# Altium PCB PCB1.PcbDoc
Units mil, origin at the board's own origin, x right, y up, seen from the top; angles counter-clockwise.
Board outline 2280 x 2260 mil, 2 copper layers (Top Layer, Bottom Layer); 65 components, 55 nets, 272 pads, 106 vias.
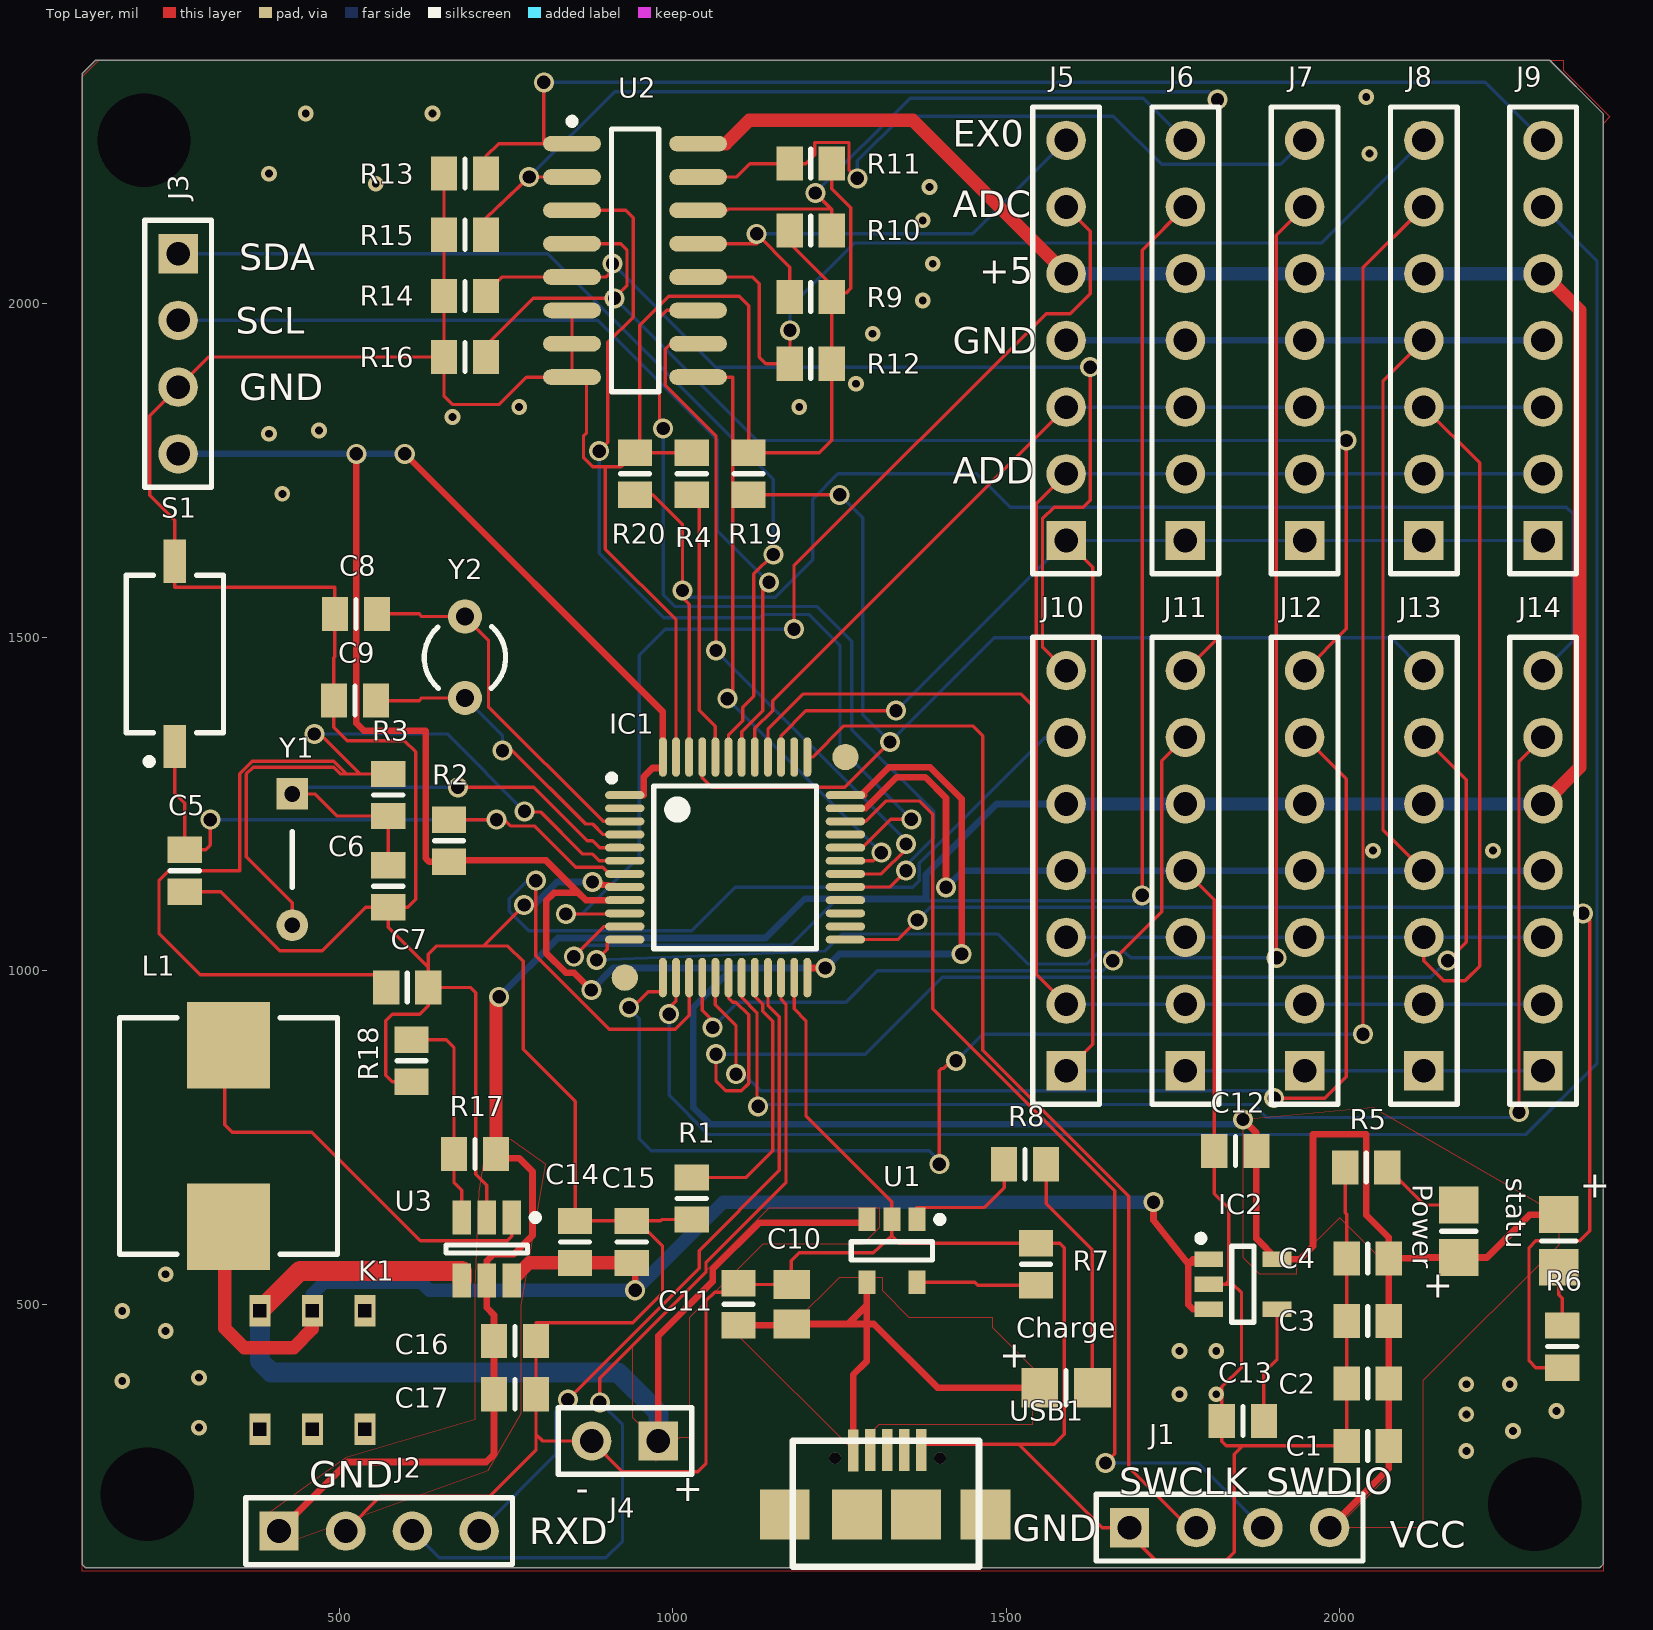
[diagram p0: Top Layer view]
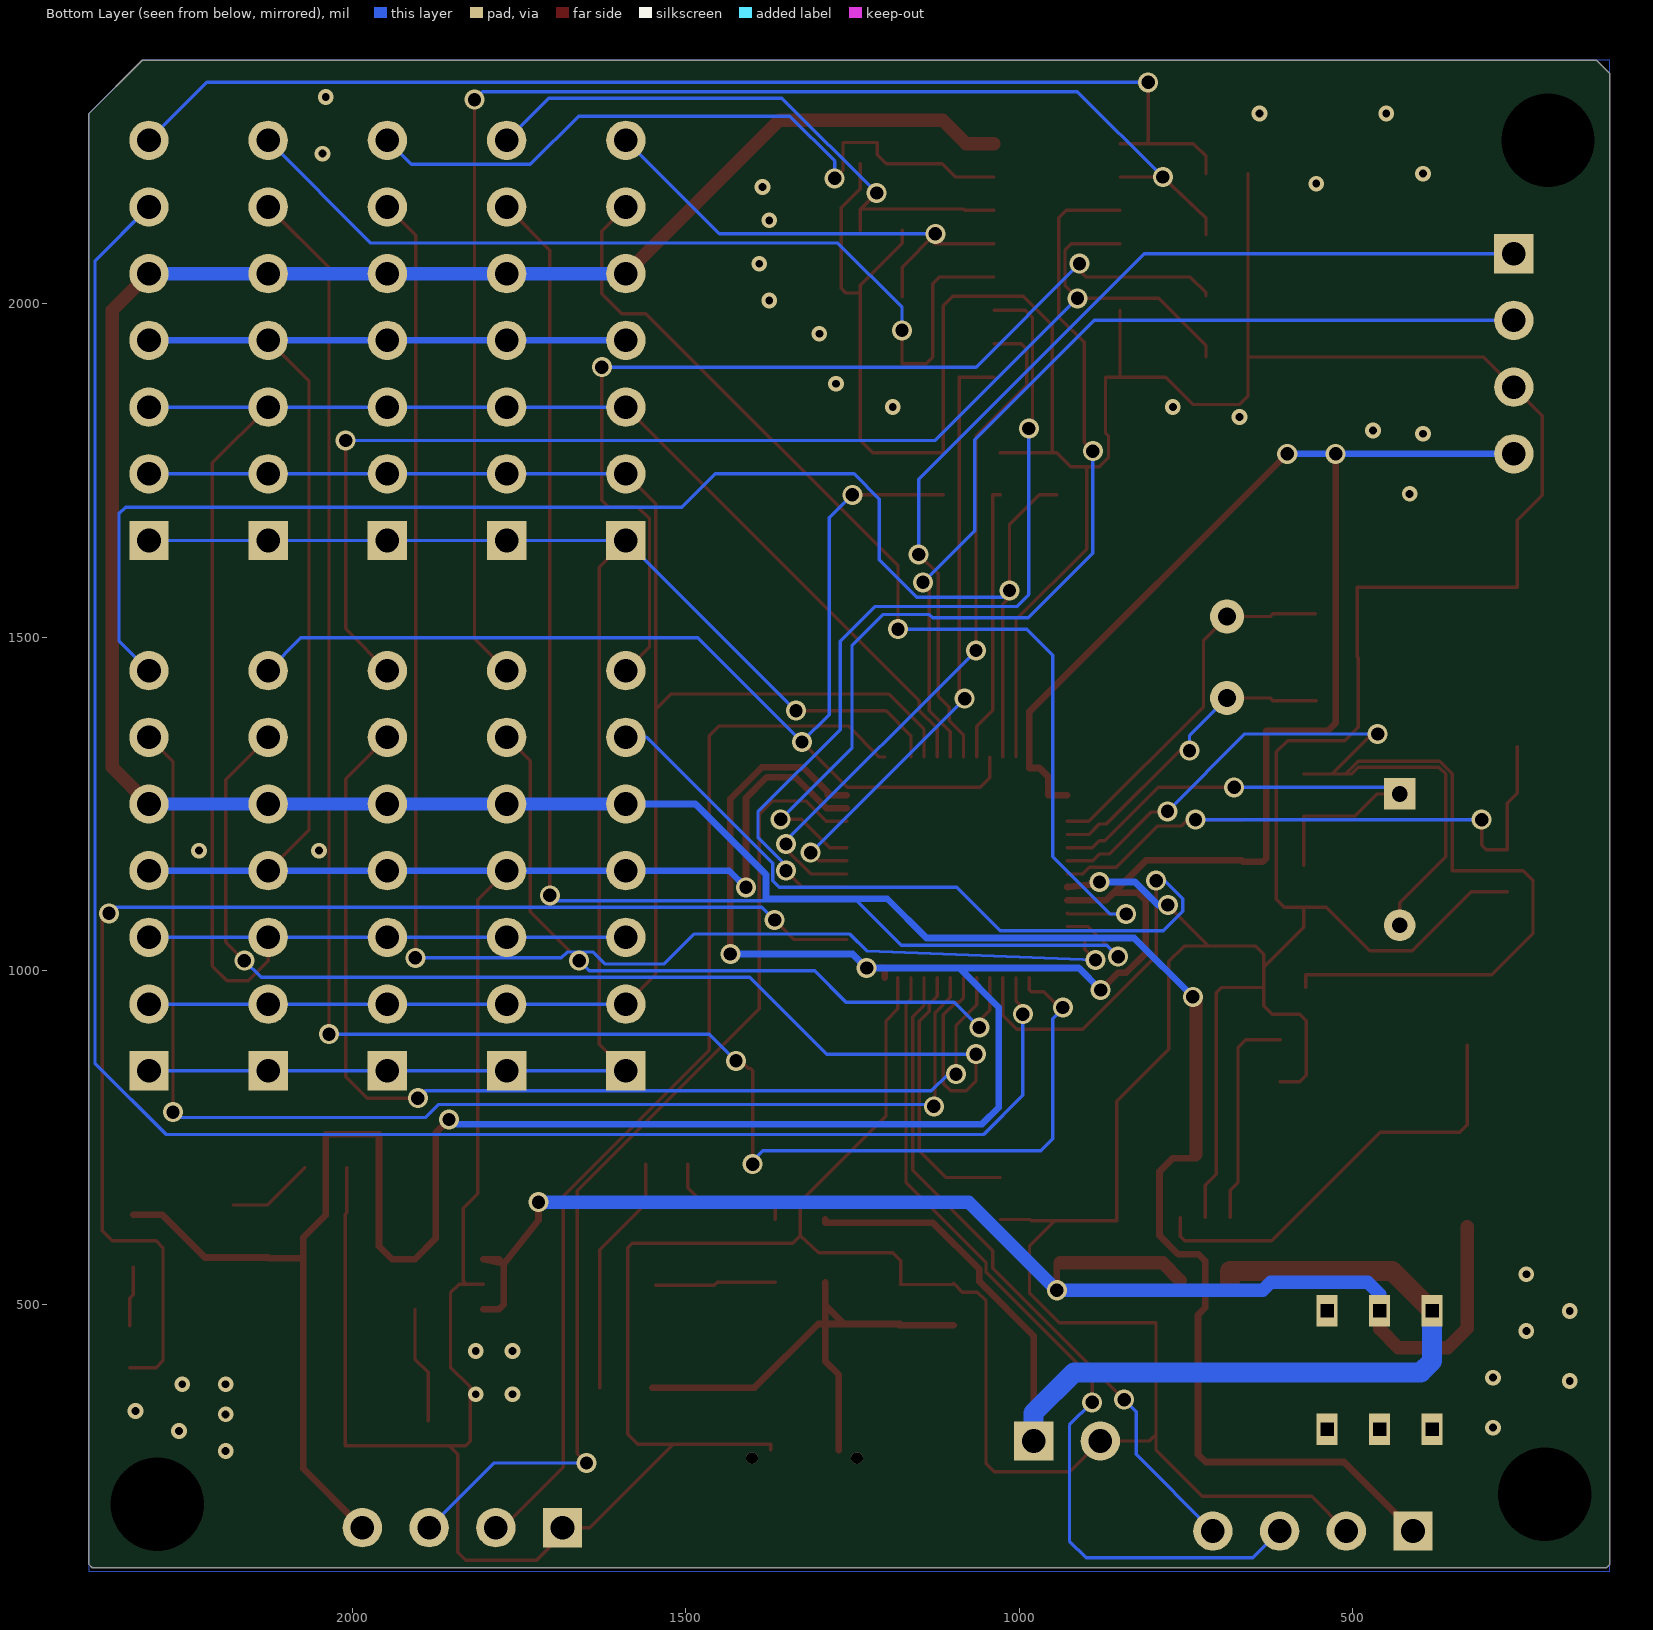
[diagram p1: Bottom Layer view, seen from below]

## Layer stack, top to bottom
Top Solder: solder mask 0.4, Solder Resist, Dk 3.5
Top Layer: signal copper 1.4
Dielectric 1: dielectric 12.6, FR-4, Dk 4.8
Bottom Layer: signal copper 1.4
Bottom Solder: solder mask 0.4, Solder Resist, Dk 3.5

## Board outline
115,110 120,105 2390,105 2395,110 2395,2285 2315,2365 135,2365 115,2345

## Design rules (kind name [scope] priority, off if disabled: settings)
Clearance Clearance_3 [InNamedPolygon('Top Layer-BAT') Or  InNamedPolygon('Top Layer-No Net') Or  InNamedPolygon('Top Layer-POWER') Or  InNamedPolygon('Top Layer-GND') Or  InNamedPolygon('Top Layer-+5') Or  InNamedPolygon('Top Layer-VCC3.3')] p1: gap=5 ignorepadtopadclearanceinfootprint=FALSE except(10: SMDPad-THPad THPad-THPad Fill-Fill Fill-Poly Fill-Region Poly-Poly Poly-Region Region-Region)
Clearance Clearance_1 [All] p2: gap=5 ignorepadtopadclearanceinfootprint=TRUE
PlaneConnect [All] p1: planeconnectstyle=Direct reliefexpansion=20 reliefentries=4 reliefconductorwidth=10 reliefairgap=10
PolygonConnect [All] p1: connectstyle=Direct reliefconductorwidth=10 reliefentries=4 polygonreliefangle="90 Angle" airgapwidth=10
RoutingVias [All] p1: holewidth=20 width=30 viastyle="Through Hole" minholewidth=15 minwidth=30 maxholewidth=20 maxwidth=50
SolderMaskExpansion [All] p1: expansion=4
Width [InNetClass('Power')] p1: maxlimit=30 minlimit=10 preferedwidth=10 minimp=50.000000 maximp=50.000000 favimp=50.000000
Width Width_2 [InNetClass('All Nets')] p2: maxlimit=25 minlimit=5 preferedwidth=5 minimp=50.000000 maximp=50.000000 favimp=50.000000
29 further rules are at their usual default settings.

## Classes and differential pairs
net class POWER: +5 BAT BAT+ GND POWER

## Components (designator, comment, footprint, x,y, rotation, side; value= is the part's Value field where it differs from the comment)
C1 "0.1uf" 6-0805_L 2042.25,287.5 r0 top value=104
C2 "1uf" 6-0805_L 2042.25,381.25 r0 top
C3 "0.1uf" 6-0805_L 2042.25,475 r0 top value=104
C4 "0.1uf" 6-0805_L 2042.25,568.75 r0 top value=104
C5 "0.1uf" 6-0805_L 268.75,1150 r90 top value=104
C6 "22pF" 6-0805_L 573.75,1126.5 r90 top
C7 "22pF" 6-0805_L 602.25,975 r180 top
C8 "22pF" 6-0805_L 525.25,1535 r0 top
C9 "22pF" 6-0805_L 523.75,1405 r0 top
C10 "1uF" C0805 1178.75,500 r90 top
C11 "0.1uf" 6-0805_L 1098.75,500 r270 top value=104
C12 "2.2uF" 6-0805_L 1843.75,730 r0 top
C13 "470pF" 6-0805_L 1855,325 r0 top
C14 "10uF" 6-0805_L 853.75,593.5 r270 top
C15 "0.1uF" 6-0805_L 938.75,593.5 r270 top
C16 "0.1uf" 6-0805_L 763.75,445 r180 top
C17 "22uf" 6-0805_L 763.75,365 r180 top
Charge "LED_Green" 6-0805_M 1590,375 r0 top (schematic designator D3)
IC1 "STM32F103C8T6" LQFP48 1093.75,1155 r0 top
IC2 "MIC5205-3.3" SOT-23-5 1855,530 r0 top
J1 "CON4" HDR1X4 1685,165 r0 top
J2 "蓝牙" HDR1X4 410,160 r0 top
J3 "MPU6050" HDR1X4 258.75,2075 r270 top
J4 "BAT" HDR1X2 978.75,295 r180 top
J5 "CON7" HDR1X7 1590,1645 r90 top
J6 "CON7" HDR1X7 1768.75,1645 r90 top
J7 "CON7" HDR1X7 1947.5,1645 r90 top
J8 "CON7" HDR1X7 2126.25,1645 r90 top
J9 "CON7" HDR1X7 2305,1645 r90 top
J10 "CON7" HDR1X7 1590,850 r90 top
J11 "CON7" HDR1X7 1768.75,850 r90 top
J12 "CON7" HDR1X7 1947.5,850 r90 top
J13 "CON7" HDR1X7 2126.25,850 r90 top
J14 "CON7" HDR1X7 2305,850 r90 top
K1 "BUTTON" switch 538.75,490 r270 top
L1 "10UH" 0850 334.26,752.26 r90 top
Power "LED_Red" 6-0805_M 2178.75,609.37 r90 top (schematic designator D1)
R1 "10K" 6-0805_L 1028.75,658.5 r270 top
R2 "10K" 6-0805_L 665,1195 r270 top
R3 "10M" 6-0805_L 573.75,1263.5 r90 top
R4 "10K" 6-0805_L 1028.75,1745 r270 top
R5 "1K" 6-0805_L 2040,705 r0 top
R6 "1K" 6-0805_L 2333.75,436.5 r90 top
R7 "330" 6-0805_L 1545,560 r90 top
R8 "330" 6-0805_L 1528.5,710 r0 top
R9 "10K" 6-0805_L 1207.25,2010 r180 top
R10 "10K" 6-0805_L 1207.25,2110 r0 top
R11 "10K" 6-0805_L 1207.25,2210 r180 top
R12 "10K" 6-0805_L 1207.25,1910 r180 top
R13 "10K" 6-0805_L 688.75,2195 r0 top
R14 "10K" 6-0805_L 688.75,2011.67 r0 top
R15 "10K" 6-0805_L 688.75,2103.33 r0 top
R16 "10K" 6-0805_L 688.75,1920 r0 top
R17 "525K" 6-0805_L 703.75,725 r180 top
R18 "100k" 6-0805_L 608.75,865 r270 top
R19 "10K" 6-0805_L 1113.75,1745 r270 top
R20 "10K" 6-0805_L 943.75,1745 r270 top
S1 "KEY_2P" button 253.75,1475 r90 top
statu "LED_Blue" 6-0805_M 2328.75,595 r270 top (schematic designator D2)
U1 "PW4054" SOT-23-CT5_L 1328.75,580 r270 top
U2 "CD4051BCM" M16A_N 943.75,2065 r0 top
U3 "PS7516" SOT23-6_M 721.35,582.76 r270 top
USB1 "MICRO USB" "MICRO USB" 1318.74,233.23 r0 top
Y1 "XTAL_8M" xtal 430,1265 r270 top
Y2 "XTAL_32.768K" R38 688.75,1470 r0 top

## Footprints (in the part's own frame and the unit in brackets; to place one, negate y for a bottom-side part, rotate by r counter-clockwise, add the part's x,y. Pads: shape width x height; smd on the part's side, far side on the other; paste and mask are expansions set on the pad)
6-0805_L [mm] "Chip Resistor, Body 2.0x1.2mm, IPC High Density"
  rect 1x1.3 smd: 1(-0.8,0) 2(0.8,0)
  silkscreen extent 0,-0.55 0,0.55, body extent -1.07,-0.7 1.07,0.7, height 0.7
6-0805_M [mm] "Chip Resistor, Body 2.0x1.2mm, IPC Low Density"
  rect 1.4x1.5 smd: 1(-1,0) 2(1,0)
  silkscreen extent 0,-0.65 0,0.65, body extent -1.07,-0.7 1.07,0.7, height 0.7
0850 [mm] "电感"
  rect 3.3x3.15 smd: 1(-3.45,0) 2(3.45,0)
  silkscreen extent -4.5,-4.15 4.5,4.15, body extent -4.5,-4.15 4.5,4.15, height 5
button [mm] "SODFL, 2-Leads, Body 3.70x8.00mm, IPC Medium Density"
  rect 1.65x0.85 smd: 1(-3.525,0) 2(3.525,0)
  silkscreen extent -4.22,-1.85 3,1.85, body extent -3,-1.85 3,1.85, height 2.5
C0805 [mm] "Chip Capacitor, Body 2.0x1.3mm, IPC High Density"
  rect 1.1x1.4 smd: 1(-0.75,0) 2(0.75,0)
  body extent -1.1,-0.72 1.1,0.72, height 1.4
HDR1X2 [mm] "Connector; Header; 2 Position"
  rect 1.5x1.5 hole 0.9: 1(0,0)
  round 1.5 hole 0.9: 2(2.54,0)
  silkscreen extent -1.27,-1.27 3.81,1.27
HDR1X4 [mm] "Connector; Header; 4 Position"
  rect 1.5x1.5 hole 0.9: 1(0,0)
  round 1.5 hole 0.9: 2(2.54,0) 3(5.08,0) 4(7.62,0)
  silkscreen extent -1.27,-1.27 8.89,1.27, body extent -1.27,-1.27 8.89,1.27, height 8.38
HDR1X7 [mm] "Connector; Header; 7 Position"
  rect 1.5x1.5 hole 0.9: 1(0,0)
  round 1.5 hole 0.9: 2(2.54,0) 3(5.08,0) 4(7.62,0) 5(10.16,0) 6(12.7,0) 7(15.24,0)
  silkscreen extent -1.27,-1.27 16.51,1.27
LQFP48 [mm]
  oval 1.5x0.3 smd: 1(-4.2,2.75) 2(-4.2,2.25) 3(-4.2,1.75) 4(-4.2,1.25) 5(-4.2,0.75) 6(-4.2,0.25) 7(-4.2,-0.25) 8(-4.2,-0.75) 9(-4.2,-1.25) 10(-4.2,-1.75) 11(-4.2,-2.25) 12(-4.2,-2.75) 25(4.2,-2.75) 26(4.2,-2.25) 27(4.2,-1.75) 28(4.2,-1.25) 29(4.2,-0.75) 30(4.2,-0.25) 31(4.2,0.25) 32(4.2,0.75) 33(4.2,1.25) 34(4.2,1.75) 35(4.2,2.25) 36(4.2,2.75)
  oval 0.3x1.5 smd: 13(-2.75,-4.2) 14(-2.25,-4.2) 15(-1.75,-4.2) 16(-1.25,-4.2) 17(-0.75,-4.2) 18(-0.25,-4.2) 19(0.25,-4.2) 20(0.75,-4.2) 21(1.25,-4.2) 22(1.75,-4.2) 23(2.25,-4.2) 24(2.75,-4.2) 37(2.75,4.2) 38(2.25,4.2) 39(1.75,4.2) 40(1.25,4.2) 41(0.75,4.2) 42(0.25,4.2) 43(-0.25,4.2) 44(-0.75,4.2) 45(-1.25,4.2) 46(-1.75,4.2) 47(-2.25,4.2) 48(-2.75,4.2)
  round 1 smd: 49(-4.2,-4.2) 50(4.2,4.2)
  silkscreen extent -4.82,-3.1 3.1,3.52, body extent -4.49,-4.5 4.5,4.5, height 1.6
M16A_N [mm] "SOIC, 16-Leads, Body 9.9x3.9mm, Pitch 1.27mm, IPC Medium Density"
  oval 2.2x0.6 smd: 1(-2.4,4.445) 2(-2.4,3.175) 3(-2.4,1.905) 4(-2.4,0.635) 5(-2.4,-0.635) 6(-2.4,-1.905) 7(-2.4,-3.175) 8(-2.4,-4.445) 9(2.4,-4.445) 10(2.4,-3.175) 11(2.4,-1.905) 12(2.4,-0.635) 13(2.4,0.635) 14(2.4,1.905) 15(2.4,3.175) 16(2.4,4.445)
  silkscreen extent -2.52,-5 0.9,5.42, body extent -2,-5 2,5, height 1.75
"MICRO USB" [mm]
  rect 0.4x1.6 smd: 1(-1.216,1.214) 2(-0.575,1.225) 3(0.075,1.225) 4(0.725,1.225) 5(1.375,1.225)
  rect 1.9x1.9 smd: ""(-3.825,-1.225) ""(-1.075,-1.225) ""(1.175,-1.225) ""(3.825,-1.225)
  silkscreen extent -3.53,-3.22 3.57,1.58, body extent -4.43,-3.77 4.38,1.82, height 2.54
R38 [mm] "Crystal, Thru-Hole; 2 Leads; Body 3.1 x 8.2 mm (Dia.xH)"
  round 1.3 hole 0.7: 1(0,1.55) 2(0,-1.55)
  silkscreen extent -1.55,-1.19 1.55,1.17
SOT23-6_M [mm] "SOT23, 6-Leads, Body 2.9x1.6mm, Pitch 0.95mm, Lead Span 2.7mm, IPC Low Density"
  rect 1.3x0.7 smd: 1(-1.2,0.95) 2(-1.2,0) 3(-1.2,-0.95) 4(1.2,-0.95) 5(1.2,0) 6(1.2,0.95)
  silkscreen extent -1.32,-1.55 0.15,1.98, body extent -0.9,-1.55 0.9,1.55, height 1.45
SOT-23-5 [mm]
  rect 1.1x0.6 smd: 1(-1.3,0.95) 2(-1.3,0) 3(-1.3,-0.95) 4(1.3,-0.95) 5(1.3,0.95)
  silkscreen extent -1.72,-1.45 0.42,1.87, body extent -1.37,-1.45 1.43,1.45, height 1.45
SOT-23-CT5_L [mm] "SOT23, 5-Leads, Body 2.9x1.6mm, Pitch 0.95mm, Lead Span 2.7mm, IPC High Density"
  rect 0.9x0.65 smd: 1(-1.2,0.95) 2(-1.2,0) 3(-1.2,-0.95) 4(1.2,-0.95) 5(1.2,0.95)
  silkscreen extent -1.32,-1.55 0.35,1.95, body extent -0.9,-1.55 0.9,1.55, height 1.45
switch [mm]
  rect 1.2x0.8 hole 0.5 square: 1(0,0) 2(0,-2) 3(0,-4) 4(4.5,0) 5(4.5,-2) 6(4.5,-4)
xtal [mm]
  rect 1.2x1.2 hole 0.6: 1(0,0)
  round 1.2 hole 0.6: 2(5,0)
  silkscreen extent 1.43,0 3.56,0

## Part data
C1 C2 C3 C4 C5 C6 C7 C8 C9 C11 C12 C13 C14 C15 C16 C17: library part "Cap Semi", "Capacitor (Semiconductor SIM Model)", LatestRevisionDate=29-May-2009, LatestRevisionNote="IPC-7351 Footprint Added.", PackageDescription="Chip Capacitor", PackageReference=C1206, Published=8-Jun-2000, Publisher="Altium Limited"
C10: library part "Cap Pol3", "Polarized Capacitor (Surface Mount)", LatestRevisionDate=29-May-2009, LatestRevisionNote="IPC-7351 Footprint Added.", PackageDescription="Chip Capacitor", PackageReference=C0805, Published=8-Jun-2000, Publisher="Altium Limited"
Charge Power statu: library part LED, "LED"
IC1: "单片机", ComponentLink1Description="Manufacturer Link", ComponentLink1URL=www.st.com/stm32, ComponentLink2Description=Datasheet, ComponentLink2URL=http://www.st.com/stonline/products/literature/ds/13587.pdf, DatasheetVersion="rev6, Mar-2008", PackageDescription="48-Pin Low-Profile Quad Flat Pack, 7 x 7 mm Body, 0.5 mm Pitch (LQFP48)", PackageReference=LQFP48, PackageVersion=Mar-2008, Published=30-May-2008, Publisher="Altium Limited"
IC2: "稳压"
J1: "连接器"
J2 J3: library part CON4, "Connector"
J4: library part CON2, "Conjunctor"
J5 J6 J7 J8 J9 J10 J11 J12 J13 J14: "Connector"
K1: "自锁按键"
L1: library part Inductor, "电感"
R1 R2 R3 R4 R5 R6 R7 R8 R9 R10 R11 R12 R13 R14 R15 R16 R17 R18 R19 R20: library part Res3, "Resistor", LatestRevisionDate=29-May-2009, LatestRevisionNote="IPC-7351 Footprint Added.", PackageDescription="Chip Resistor", PackageReference=J1-0603, Published=8-Jun-2000, Publisher="Altium Limited"
S1: "轻触按键2P"
U2: "8-Channel Analog Multiplexer/Demultiplexer", Code_IPC=SOIC127P600-16, ComponentLink1Description="Manufacturer Link", ComponentLink1URL=http://www.fairchildsemi.com/, ComponentLink2Description=Datasheet, ComponentLink2URL=http://www.fairchildsemi.com/ds/CD%2FCD4052BC.pdf, DatasheetVersion=Jan-1999, LatestRevisionDate=13-Apr-2006, LatestRevisionNote="IPC-7351 Footprint Added.", PackageDescription="16-Pin Small Outline Integrated Circuit 1.27 mm Pitch", PackageReference=M16A, PackageVersion=2000, Published=17-Jul-2002, Publisher="Altium Limited"
Y1 Y2: library part XTAL, "Crystal Oscillator", LatestRevisionDate=17-Jul-2002, LatestRevisionNote="Re-released for DXP Platform.", PackageDescription="Crystal, Thru-Hole; 2 Leads; Body 3.1 x 8.2 mm (Dia.xH)", PackageReference=R38, Published=8-Jun-2000, Publisher="Altium Limited"

## Free pads (board coordinates)
  rect 47.24x31.5 hole 140: ""(207.5,2245) ""(212.5,215) ""(2292.5,200)

## Via types
v1: diameter 30, hole 20, Top Layer to Bottom Layer, tented both sides, 68 vias
v2: diameter 23.62, hole 11.81, Top Layer to Bottom Layer, tented both sides, 36 vias
v3: diameter 17.72, hole 17.72, Top Layer to Bottom Layer, 2 vias

## Nets (pads, with @x,y where several pads share a name; then routed paths per layer and width w, separated by ;. In a path a pad name is that pad's centre, name@x,y a point inside that pad or via, vN(x,y) a via of type N, cw(c..) or ccw(c..) an arc to the next point about the centre after c; other vN are vias at no path point)
+5: C16.2 C17.2 J2.1 J5.5 J6.5 J7.5 J8.5 J9.5 J10.5 J11.5 J12.5 J13.5 J14.5 R17.1 U2.16 U3.5 | length 5074.8
  Top Layer w10: J2.1 513.51,263.51 720.76,263.51 732.25,275 C17.2 C16.2 732.25,484 721.35,494.91 U3.5 721.35,565 731.35,575 762,575 790,603 790,699 770,719 735.25,719 R17.1 ; v1@735.25,956.25 v1(740,961)
  Top Layer w20: R17.1 v1@735.25,956.25 ; U2.16 1080,2240 1115,2275 1360,2275 J5.5 ; J14.5 2360,1305 2360,1990 J9.5
  Bottom Layer w10: v1(740,961) 828,1049 1139.22,1049 1198.22,1108 1380,1108 1380,1144.15 1485.85,1250 J10.5
  Bottom Layer w20: J10.5 J11.5 J12.5 J13.5 J14.5 ; J5.5 J6.5 J7.5 J8.5 J9.5
ADC0: IC1.10 J5.6 | length 1637.4
  Top Layer w5: v1(840,1085) 927.29,1085 IC1.10 ; v1(1182,1512) 1182,1607 1560,1985 1596,1985 1626,2015 1626,2109 J5.6
  Bottom Layer w5: v1(840,1085) 863.82,1085 950,1171.18 950,1473 989,1512 v1(1182,1512)
ADC1: IC1.11 J6.6 | length 2044.1
  Top Layer w5: v1(852,1021) 897.42,1066.42 IC1.11 ; v1(1704,1113) 1704,2080.25 J6.6
  Bottom Layer w5: v1(852,1021) 869,1038 1177,1038 1244,1105 1696,1105 v1(1704,1113)
ADC2: IC1.12 J7.6 | length 2267.8
  Top Layer w5: v1(886,1016) 902,1032 902,1046.73 IC1.12 ; v1(1905.75,1019.25) 1905,1020 1905,2102.5 J7.6
  Bottom Layer w5: v1(886,1016) 1228.5,1029.5 1254,1055 1488,1055 1533,1010 1620.79,1010 1638.83,1028.04 1677.79,1028.04 1686.58,1019.25 v1(1905.75,1019.25)
ADC3: IC1.13 J8.6 | length 2827.4
  Top Layer w5: v1(935,945) 935.43,944.57 939.57,944.57 963.52,968.52 982.34,968.52 985.48,971.67 IC1.13 ; v1(1400,710) 1400,850 1403.54,853.54 1406.77,853.54 1418.24,865 v1(1425,865) ; v1(2035,905) 2035,2053.75 J8.6
  Bottom Layer w5: v1(935,945) 935,943.18 950,928.18 950,747.93 967.93,730 1385,730 1400,715 v1(1400,710) ; v1(1425,865) 1465,905 v1(2035,905)
ADC4: IC1.14 J9.6 | length 2957.4
  Top Layer w5: v1(995,935) 995,945 1005.17,955.17 IC1.14
  Bottom Layer w5: v1(995,935) 995,813.32 1053.82,754.5 2279.16,754.5 2386,861.34 2386,2064 J9.6
ADC5: IC1.15 J10.6 | length 1505.3
  Top Layer w5: v1(795,1135) 795,1022.55 905.05,912.5 1004.32,912.5 1024.85,933.03 IC1.15
  Bottom Layer w5: v1(795,1135) 782.18,1135 755,1107.82 755,1089.18 784.18,1060 1029,1060 1094,1125 1360,1125 1370,1135 1370,1161 1559,1350 J10.6
ADC6: IC1.16 J11.6 | length 1102.5
  Top Layer w5: IC1.16 1044.54,940.46 1060,925 v1(1060,915) ; v1(1660,1015) 1733.22,1088.22 1733.22,1314.47 J11.6
  Bottom Layer w5: v1(1060,915) 1098,953 1260,953 1307,1000 1645,1000 v1(1660,1015)
ADC7: IC1.17 J12.6 | length 1635.4
  Top Layer w5: IC1.17 1064.22,948.78 1095,918 v1(1095,845) ; v1(1902,809) 1978,809 2010,841 2010,1287.5 J12.6
  Bottom Layer w5: v1(1095,845) 1107,845 1132,820 1891,820 v1(1902,809)
ADC8: IC1.18 J13.6 | length 1801.8
  Top Layer w5: v1(1065,875) 1065,835 1080,820 1103,820 1113.96,830.96 1113.96,934.1 1095.05,953 1090,953 1083.91,959.09 IC1.18 ; J13.6 2190,1286.25 2190,1043 v1(2162,1015)
  Bottom Layer w5: v1(1065,875) 1289,875 1404,990 2137,990 v1(2162,1015)
ADC9: IC1.19 J14.6 | length 1933.3
  Top Layer w5: IC1.19 1103.59,960 1126.5,937.09 1126.5,798.5 v1(1128.25,796.75) ; v1(2269,788) 2269,1314 J14.6
  Bottom Layer w5: v1(1128.25,796.75) 1131,799.5 1870.5,799.5 1890,780 2261,780 v1(2269,788)
Address_0: IC1.29 U2.11 | length 1305.3
  Top Layer w5: v1(986,1813) 980.43,1818.57 980.43,1979.43 991,1990 U2.11 ; IC1.29 1325.47,1125.47 v1(1350,1150)
  Bottom Layer w5: v1(986,1813) 986,1564 1004,1546 1217,1546 1268.79,1494.21 1268.79,1361.21 1392,1238 1392,1200 1350,1158 v1(1350,1150)
Address_1: IC1.30 U2.10 | length 1058.2
  Top Layer w5: U2.10 997,1940 988.93,1931.93 988.93,1878.07 1065,1802 v1(1065,1480) ; IC1.30 1312.96,1145.16 1350,1182.2 v1(1350,1190)
  Bottom Layer w5: v1(1065,1480) 1350,1195 v1(1350,1190)
Address_2: IC1.31 U2.9 | length 922.7
  Top Layer w5: U2.9 1090,1890 1090,1415.98 v1(1082,1407.98) ; IC1.31 1300.82,1164.84 v1(1312.98,1177)
  Bottom Layer w5: v1(1082,1407.98) v1(1312.98,1177)
Address_3: IC1.39 J5.1 J6.1 J7.1 J8.1 J9.1 J10.1 J11.1 J12.1 J13.1 J14.1 | length 2838.9
  Top Layer w5: IC1.39 1162.65,1352.65 1200,1390 v1(1335,1390) ; J10.1 1630,890 1630,1605 J5.1
  Bottom Layer w5: v1(1335,1390) J5.1 J6.1 J7.1 J8.1 J9.1 ; J10.1 J11.1 J12.1 J13.1 J14.1
Address_4: IC1.40 J5.2 J6.2 J7.2 J8.2 J9.2 J10.2 J11.2 J12.2 J13.2 J14.2 | length 2737.3
  Top Layer w5: IC1.40 1142.96,1361.73 1196.23,1415 1522,1415 1545,1392 ; J10.2 1545,995 1545,1392 ; J5.2 1545,1700 1545,1392
  Bottom Layer w5: J10.2 J11.2 J12.2 J13.2 J14.2 ; J5.2 J6.2 J7.2 J8.2 J9.2
Address_5: IC1.41 J5.3 J6.3 J7.3 J8.3 J9.3 J10.3 J11.3 J12.3 J13.3 J14.3 | length 3161.1
  Top Layer w5: IC1.41 1123.28,1363.28 1150,1390 1150,1405 J5.3 ; J13.3 2126.25,1014.75 2156,985 2188,985 2210,1007 2210,1761.25 J8.3
  Bottom Layer w5: J10.3 J11.3 J12.3 J13.3 J14.3 ; J5.3 J6.3 J7.3 J8.3 J9.3
BAT: J4.1 K1.3 U1.3 U3.4 | length 1645.4
  Top Layer w10: J4.1 978.75,452.78 1060,534.03 1060,552.41 1129.59,622 1291.35,622 U1.3
  Top Layer w30: K1.3 441.27,550 683.95,550 U3.4
  Bottom Layer w30: K1.3 381.27,415 398.27,398 918.02,398 978.75,337.27 J4.1
BAT+: C14.2 C15.2 IC2.1 IC2.3 K1.2 L1.1 U3.6 | length 2195
  Top Layer w10: C15.2 944,562.01 v1(944,521) ; v1(1721,653) 1721,626 1773,560.4 ; IC2.3 1780,492.6 1773,499.6 1773,560.4 ; 1773,560.4 IC2.1 1780,567.4 1773,560.4
  Top Layer w20: L1.1@328.75,616.43 328.75,464.25 358,435 432,435 460.01,463.01 K1.2 ; U3.6 785.25,562.01 C14.2 C15.2
  Bottom Layer w20: K1.2 460.01,515 478.01,533 623,533 635,521 v1(944,521) 1076,653 v1(1721,653)
BOOT0: IC1.44 R4.2 | length 414.4
  Top Layer w5: R4.2 1040,1713.5 1040,1390.5 1064.22,1366.27 IC1.44
BOOT1: IC1.20 R1.1 | length 408.5
  Top Layer w5: R1.1 1110,690 1150,730 1150,924.04 1135,939.04 1135,950 1123.28,961.72 IC1.20
Common_Out: IC1.32 U2.3 | length 1464.5
  Top Layer w5: U2.3 930,2140 941,2129 941,1980 903,1942 903,1792 v1(890,1779) ; IC1.32 1284.53,1184.53 1327,1227 v1(1358,1227)
  Bottom Layer w5: v1(890,1779) 890,1626 987,1529 1130,1529 1135,1534 1205,1534 1251,1488 1251,1334 v1(1358,1227)
EX0: J5.7 R9.2 U2.13 | length 740
  Top Layer w5: U2.13 1126,2090 v1(1126,2104.76) 1175.76,2055 R9.2
  Bottom Layer w5: v1(1126,2104.76) 1449.76,2104.76 J5.7
EX1: J6.7 R10.2 U2.14 | length 906.5
  Top Layer w5: U2.14 1082,2140 1084,2142 1238,2142 ; v1(1214,2166) 1238,2142 ; R10.2 1238.75,2141.25 1238,2142
  Bottom Layer w5: v1(1214,2166) 1356,2308 1705.75,2308 J6.7
EX2: J7.7 R11.2 U2.15 | length 1086.2
  Top Layer w5: U2.15 1096,2190 1116,2210 R11.2 1200,2210 1213,2223 1213,2241.59 1264.44,2241.59 1264.44,2200.56 v1(1277,2188)
  Bottom Layer w5: v1(1277,2188) 1277,2214 1344,2281 1661,2281 1733,2209 1911.5,2209 J7.7
EX3: J8.7 R12.2 U2.12 | length 1394.8
  Top Layer w5: U2.12 1120,2040 1130,2030 1130,1920 1140,1910 R12.2 1176,1910 v1(1176,1960)
  Bottom Layer w5: v1(1176,1960) 1176,1995 1272,2091 1972.25,2091 J8.7
EX4: J9.7 R13.2 U2.1 | length 1789
  Top Layer w5: R13.2 720.25,2221.13 739.11,2240 U2.1@807,2240 ; v1(807,2332) U2.1@807,2240 ; U2.1 U2.1@807,2240
  Bottom Layer w5: v1(807,2332) 2218,2332 J9.7
EX5: J10.7 R14.2 U2.5 | length 1523.8
  Top Layer w5: R14.2 720.25,2016.5 743.75,2040 U2.5 900,2040 910,2050 v1(910,2060) ; J10.7 1554.47,1485.53 1554.47,1677.5 1571.97,1695 1616,1695 1626,1705 v1(1626,1905)
  Bottom Layer w5: v1(910,2060) 1065,1905 v1(1626,1905)
EX6: J11.7 R15.2 U2.2 | length 2144.6
  Top Layer w5: R15.2 720.25,2128.25 v1(785,2190) U2.2 ; J11.7 1817,1498.25 v1(1817,2306)
  Bottom Layer w5: v1(785,2190) 913,2318 1805,2318 v1(1817,2306)
EX7: J12.7 R16.2 U2.4 | length 1961.9
  Top Layer w5: R16.2 720.25,1937.25 791,2008 v1(913,2008) 931.57,2026.57 931.57,2080.65 922.22,2090 U2.4 ; J12.7 2010,1512.5 v1(2010,1795)
  Bottom Layer w5: v1(913,2008) 1126,1795 v1(2010,1795)
EX8: IC1.45 J13.7 R19.2 | length 1770.2
  Top Layer w5: IC1.45 1044.54,1289.46 1059,1275 1258,1275 v1(1326,1343) ; R19.2 v1(1250.5,1713.5)
  Bottom Layer w5: v1(1250.5,1713.5) 1285,1679 1285,1384 v1(1326,1343) 1482,1499 2077.25,1499 J13.7
EX9: IC1.46 J14.7 R20.2 | length 2189.7
  Top Layer w5: R20.2 970,1713.5 1015,1668.5 v1(1015,1570) 1015,1559 1024.85,1549.15 IC1.46
  Bottom Layer w5: v1(1015,1570) 1025,1560 1154.07,1560 1210,1615.93 1210,1707 1248,1745 1456,1745 1506,1695 2340,1695 2350,1685 2350,1495 J14.7
GND: C1.1 C2.1 C3.1 C4.1 C5.1 C6.1 C7.1 C8.1 C9.1 C10.2 C11.1 C12.1 C13.1 C14.1 C15.1 C16.1 C17.1 IC1.8 IC1.23 IC1.35 IC1.47 IC2.2 J1.1 J2.2 J3.3 J4.2 J5.4 J6.4 J7.4 J8.4 J9.4 J10.4 J11.4 J12.4 J13.4 J14.4 R1.2 R4.1 R5.1 R7.2 R9.1 R10.1 R11.1 R12.1 R13.1 R14.1 R15.1 R16.1 R18.2 R19.1 R20.1 S1.2 U1.2 U2.6 U2.7 U2.8 U3.2 USB1.5 | length 14386.8
  Top Layer w5: C5.1 322.5,1118.5 411,1030 475,1030 540,1095 C6.1 ; J2.2 562,212 726.25,212 795.25,281 795.25,305 ; R18.2 580,833.5 570,843.5 570,925 580,935 621.25,935 633.75,947.5 C7.1 ; R13.1 R15.1 R14.1 R16.1 ; U3.2 721.35,678.65 705,695 705,967 697,975 C7.1 ; v1(777.5,1098.5) 716,1037 ; U2.6 U2.7 U2.8 ; C14.1 C14.1@854,625 ; IC1.47 1005.17,1526 899,1632.17 899,1755.5 ; R1.2 984.01,627.01 982,625 C15.1@947,625 ; R4.1 R20.1@951,1776.5 ; R19.1 R19.1@1114,1776.5 ; R10.1 1175.76,2090.99 1238.75,2028 R9.1@1238.75,2016 ; C10.2 C10.2@1178,529.53 ; IC1.23 1182.33,942.67 1200,925 1200,782.75 1328.75,654 U1.2 1328.75,602.75 ; R11.1 1238.75,2172.08 1267,2143.83 1267,2023 1260,2016 R9.1@1238.75,2016 ; USB1.5 1372.87,290 1519,290 ; J11.4 1812.25,1106.5 C12.1 1812.25,666 1834,644.25 1834,535 1829,530 ; IC2.2 1829,530 ; R5.1 2008.5,637.25 2010.76,635 C4.1 C3.1 C2.1 C1.1@2010.76,288 ; C1.1 C1.1@2010.76,288 ; J13.4 2065,1211.25 2065,1883.75 J8.4 ; C6.1 603,1095 615,1107 615,1328 598,1345 512.25,1345 492.25,1365 C9.1 492.25,1469 493.75,1470.5 C8.1 493.75,1575 253.75,1575 S1.2 253.75,1675.25 216,1713 216,1832.25 J3.3 303.75,1920 R16.1 ; C6.1 573.75,1065 633.75,1005 ; C7.1 633.75,1005 ; 633.75,1005 633.75,1025 645.75,1037 716,1037 ; R16.1 657.25,1861.75 670,1849 740,1849 781,1890 U2.8 ; 716,1037 753,1037 776,1014 776,882 854,804 C14.1@854,625 ; 795.25,305 C17.1 C16.1 795.25,472.5 940.5,472.5 985,517 985,587 C15.1@947,625 ; 795.25,305 805.25,295 J4.2 924.75,249 1038,249 1050,261 1050,505 1063.25,518.25 1085.5,518.25 C11.1 1100.72,529.53 C10.2@1178,529.53 ; U2.8 871,1890 871,1806.64 866.5,1802.14 866.5,1769 880,1755.5 899,1755.5 ; C14.1@854,625 C15.1 C15.1@947,625 ; 899,1755.5 922.75,1755.5 R20.1 R20.1@951,1776.5 ; R20.1@951,1776.5 951,1968 994,2011 1100,2011 1114,1997 R19.1@1114,1776.5 ; R19.1@1114,1776.5 1220.25,1776.5 1238.75,1795 R12.1 R9.1 R9.1@1238.75,2016 ; C10.2@1178,529.53 1178,565 1190,577 1301,577 1328.75,602.75 ; 1328.75,602.75 1340,591.5 R7.2 1580.5,591.5 1587,585 1587,305 1572,290 1519,290 ; 1519,290 1644,165 1675,165 1724,116 1830,116 1842,128 1842,275 1855,288 ; 1829,530 1840,530 1853,517 1853,405.5 1823.5,376 C13.1 1823.5,294.5 1830,288 1855,288 ; 1855,288 C1.1@2010.76,288
  Top Layer w10: v1(880,1133) 880,1130.5 IC1.8 ; IC1.35 1289.48,1243.58 1335.9,1290 1379,1290 1410,1259 v1(1410,1125)
  Bottom Layer w10: v1(777.5,1098.5) 792.13,1098.5 826.63,1133 v1(880,1133) ; v1(1410,1125) 1435,1150 J10.4 J11.4 J12.4 J13.4 J14.4 ; J5.4 J6.4 J7.4 J8.4 J9.4
  other v2: 2190,280 2260,310 290,315 2190,335 2325,340 1760,365 1815,365 2190,380 2255,380 175,385 290,390 1760,430 1815,430 240,460 175,490 240,545 2050,1180 2230,1180 415,1715 395,1805 470,1810 670,1830 770,1845 1190,1845 1275,1880 1300,1955 1375,2005 1390,2060 1375,2125 1385,2175 555,2180 395,2195 2045,2225 450,2285 640,2285 2040,2310
NetC13_2: C13.2 IC2.4 | length 175.8
  Top Layer w5: C13.2 1886.5,398 1906.18,417.69 IC2.4
NetD1_2: Power.2 R5.2 | length 130.6
  Top Layer w5: R5.2 2127.76,648.74 Power.2
NetD2_2: R6.2 statu.2 | length 89.7
  Top Layer w5: statu.2 2328.75,514 2333.75,509 R6.2
NetD3_2: Charge.2 R8.2 | length 363.7
  Top Layer w5: R8.2 1560,651 1629.37,581.63 Charge.2
NetIC1_34: IC1.34 J1.3 | length 1519.4
  Top Layer w5: IC1.34 1289.4,1223.9 1320,1254.5 1370,1254.5 1390,1234.5 1390,943 1663,670 1663,276 v1(1649,262)
  Bottom Layer w5: v1(1649,262) 1788,262 J1.3
NetIC1_37: IC1.37 J1.2 | length 1611
  Top Layer w5: IC1.37 1210,1320.35 1256.65,1367 1450,1367 1465,1352 1465,881 1684,662 1684,256 J1.2@1780,160
NetL1_2: L1.2 U3.1 | length 652.1
  Top Layer w5: L1.2@328.75,888.09 328.75,769.25 340,758 459,758 622,595 752,595 758.75,601.75 U3.1
NetR7_1: R7.1 U1.5 | length 180.6
  Top Layer w5: U1.5 1453,532.76 1457.25,528.5 R7.1
NetR8_1: R8.1 U1.1 | length 196
  Top Layer w5: U1.1 1366.15,645 1467.01,645 1497.01,675 R8.1
NetR17_2: R17.2 R18.1 U3.3 | length 328.1
  Top Layer w5: R18.1 660.76,896.5 672.25,885 R17.2 672.25,682.69 683.95,671 U3.3
NRST: C5.2 IC1.7 R2.1 S1.1 | length 966.2
  Top Layer w5: S1.1 253.75,1266 268.75,1251 C5.2 300,1181.5 307,1188.5 v1(307,1226.5) ; R2.1 v1(736,1226.5) 747.59,1226.5 757,1217.08 792.92,1217.08 855,1155 895,1155 904.84,1145.16 IC1.7
  Bottom Layer w5: v1(307,1226.5) v1(736,1226.5)
PB12: IC1.25 R6.1 | length 1935
  Top Layer w5: IC1.25 1337.73,1046.73 v1(1367,1076) ; R6.1 2294,405 2284,415 2284,585 2294,595 2360,595 2375,610 2375,1076 v1(2365,1086)
  Bottom Layer w5: v1(1367,1076) 1386,1095 2356,1095 v1(2365,1086)
POWER: C10.1 C11.2 Charge.1 U1.4 USB1.1 | length 793.7
  Top Layer w10: C11.2 C10.1@1180.47,468.5 ; C10.1 1262.82,470.47 ; USB1.1 1270.87,394.52 1291.35,415 1291.35,470.47 ; U1.4 1291.35,499 ; Charge.1 1397,375 1301.53,470.47 1291.35,470.47 ; 1262.82,470.47 1291.35,499 ; 1262.82,470.47 1291.35,470.47 ; 1291.35,470.47 1291.35,499
RXD1: IC1.21 J2.4 | length 1023.1
  Top Layer w5: v1(843,357) 1040,554 1040,580.59 1160,700.59 1160,931.04 1142.96,948.08 IC1.21
  Bottom Layer w5: J2.4 825,275 825,339 v1(843,357)
SCL: IC1.42 J3.2 | length 1407.1
  Top Layer w5: IC1.42 1103.59,1358.59 1135,1390 1135,1572.75 v1(1144.55,1582.3)
  Bottom Layer w5: J3.2 887.97,1975 1067,1795.97 1067,1659.86 v1(1144.55,1582.3)
SDA: IC1.43 J3.1 | length 1476.6
  Top Layer w5: IC1.43 1083.91,1353.91 1105,1375 1105,1395 1121.86,1411.86 1121.86,1594.86 v1(1151,1624)
  Bottom Layer w5: J3.1 812.84,2075 1151,1736.84 v1(1151,1624)
TXD1: IC1.22 J2.3 | length 1319.3
  Top Layer w5: v1(891,353) 891,389.09 1050,548.09 1050,562.09 1170,682.09 1170,950 1162.65,957.35 IC1.22
  Bottom Layer w5: J2.3 650,120 900,120 925,145 925,319 v1(891,353)
VCC3.3: C1.2 C2.2 C3.2 C4.2 C12.2 IC1.1 IC1.9 IC1.24 IC1.36 IC1.48 IC2.5 J1.4 J3.4 Power.1 R2.2 statu.1 | length 5916.4
  Top Layer w10: v1(526,1775) 526,1371 537,1360 630,1360 630,1168.5 635,1163.5 R2.2 667,1165.5 810.29,1165.5 859.05,1116.74 ; v1(598.48,1775) 985.48,1388 IC1.48 985.48,1304 970,1304 957,1291 957,1263.27 IC1.1 ; v1(878.12,971.25) 852.37,997 840,997 810.5,1026.5 810.5,1105 822.24,1116.74 859.05,1116.74 ; IC1.9 870,1105.79 859.05,1116.74 ; IC1.24 1202.02,1004 v1(1229,1004) ; IC1.36 1287.02,1263.27 1287.02,1267.5 1324.52,1305 1386,1305 1433.5,1257.5 v1(1433.5,1025.04) ; v1(1855.25,777) 1875.25,757 C12.2 1875.25,598.34 IC2.5 1940.4,567.4 1960,587 1960,755 2040,755 2040,633.75 2073.75,600 C4.2 ; J1.4@1990,160 1990,170 2073.75,253.75 C1.2 C2.2 C3.2 C4.2 ; statu.1 2285.37,634.37 2221,570 Power.1 2126.25,570 2125,568.75 C4.2
  Bottom Layer w10: J3.4 v1(526,1775) v1(598.48,1775) ; v1(878.12,971.25) 910.87,1004 1090,1004 ; v1(1433.5,1025.04) 1250.04,1025.04 v1(1229,1004) 1090,1004 ; v1(1855.25,777) 1848.25,770 1056,770 1031,795 1031,945 1090,1004
XTAL_A: C6.2 IC1.5 R3.1 Y1.1 | length 743.6
  Top Layer w5: Y1.1 463.75,1265 496.74,1232.01 R3.1 C6.2 ; v1(678,1275) 792,1275 872,1195 880,1195 890.47,1184.53 IC1.5
  Bottom Layer w5: 453.75,1275 v1(678,1275)
XTAL_B: C7.2 IC1.6 R3.2 Y1.2 | length 2026.5
  Top Layer w5: Y1.2 430,1101.9 361,1170.9 361,1295 371,1305 492,1305 502,1295 511,1295 ; v1(463,1355) 471,1355 531,1295 ; C7.2 570.76,994 292,994 230,1056 230,1135 245,1150 351,1150 351,1295 370,1314 492,1314 511,1295 ; R3.2 531,1295 ; v1(778,1239) 778,1238 802,1238 865,1175 880,1175 890.16,1164.84 IC1.6 ; 511,1295 531,1295
  Bottom Layer w5: v1(463,1355) 662,1355 v1(778,1239)
XTAL_C: C8.2 IC1.3 Y2.1 | length 559
  Top Layer w5: C8.2 620,1535 623.98,1531.02 Y2.1 724,1495.77 724,1396 896.1,1223.9 IC1.3
XTAL_D: C9.2 IC1.4 Y2.2 | length 472.9
  Top Layer w5: C9.2 620,1405 623.98,1408.98 Y2.2 ; v1(745,1330) 760,1330 870,1220 880,1220 895.79,1204.21 IC1.4
  Bottom Layer w5: Y2.2 745,1352.73 v1(745,1330)
pads on no net: IC1.2 IC1.26 IC1.27 IC1.28 IC1.33 IC1.38 IC1.49 IC1.50 K1.1 K1.4 K1.5 K1.6 USB1. USB1.2 USB1.3 USB1.4
copper on no net:
  other v3: 1243.74,269.23 1400.74,269.23

## Polygon pours and split planes (outlines as drawn)
GND on Top Layer "Top Layer-GND" (solid, remove dead copper, shelved, pour order 36): 115,2340 140,2365 2335,2365 2335,2350 2405,2280 2395,2270 2395,100 115,100
no net on Top Layer "Top Layer-No Net" (solid, remove dead copper, shelved, pour order 34): 690,225
+5 on Top Layer "Top Layer-+5" (solid, remove dead copper, shelved, pour order 32): 721.82,750.64 709.61,668.94 703.43,525.73 703.43,326.57 510,270 387.5,182.5 398.43,171.57 415,140 723.79,250.83 773.43,336.57 773.43,498.43 810,710 758.43,746.57
BAT on Top Layer "Top Layer-BAT" (solid, remove dead copper, shelved, pour order 30): 970,300 940,330 940,440 1145,645 1310,645 1310,615 1285,590 1135,590 1025,480 1025,300 1010,300 975,265
POWER on Top Layer "Top Layer-POWER" (solid, remove dead copper, shelved, pour order 28): 1098.75,468.5 1098.75,453.14 1270.87,281.02 1309.84,320 1540,320 1540,375 1555,390 1480,465 1480,480 1355,480 1315,520 1315,540 1250,540 1180.47,470.47 1100.72,470.47
VCC3.3 on Top Layer "Top Layer-VCC3.3" (solid, remove dead copper, shelved, pour order 26): 1855.25,777 2050,795 2328.75,634.37 2328.75,588.75 2125,385 2125,165 1995,165 2073.75,243.75 2073.75,568.75 2061.25,568.75 2000,630 1935,565 1935,545 1880,545 1855.25,569.75
GND on Bottom Layer "Bottom Layer-GND" (solid, remove dead copper, shelved, pour order 38): 115,2365 2315,2365 2395,2285 2395,100 115,100

## Keep-outs
Top Layer:
  region: 968.75,1275 1218.75,1275 1218.75,1030 978.75,1030 973.75,1035

## Silkscreen, mask and mechanical layers (free items; w line width, h text height)
Top Overlay:
  text "EX0" at 1420,2235 h40
  text "ADC" at 1420,2130 h40
  text "SDA" at 350,2050 h40
  text "+5" at 1459.99,2030 h40
  text "SCL" at 345,1955 h40
  text "GND" at 1420,1925 h40
  text "GND" at 350,1855 h40
  text "ADD" at 1420,1730 h40
  text "+" at 2360,660 h40
  text "+" at 2125,510 h40
  text "+" at 1490,405 h40
  text "GND" at 455,225 h40
  text "SWCLK" at 1670,215 h40
  text "SWDIO" at 1890,215 h40
  text "-" at 855,205 h40
  text "+" at 1000,205 h40
  text "GND" at 1510,145 h40
  text "RXD" at 785,140 h40
  text "VCC" at 2075,135 h40
Mechanical 1:
  lines w10: 115,110 130,95 2380,95 2395,110 2395,2285 2315,2365 135,2365 115,2345 115,110
Drill Drawing:
  text ".Lengend" at 2790,2055 h40

## Text inside footprints (layer, text, board x,y; h text height)
IC2: Mechanical 15 "1" at 1872.71,523.53 h30 r90